# Altium PCB STM32 24V Industrial IO Bridge.PcbDoc (part 1 of 3)
Units mil, origin at the board's own origin, x right, y up, seen from the top; angles counter-clockwise.
Board outline 3937.01 x 3149.61 mil, 2 copper layers (Top Layer, Bottom Layer); 143 components, 89 nets, 439 pads, 318 vias.
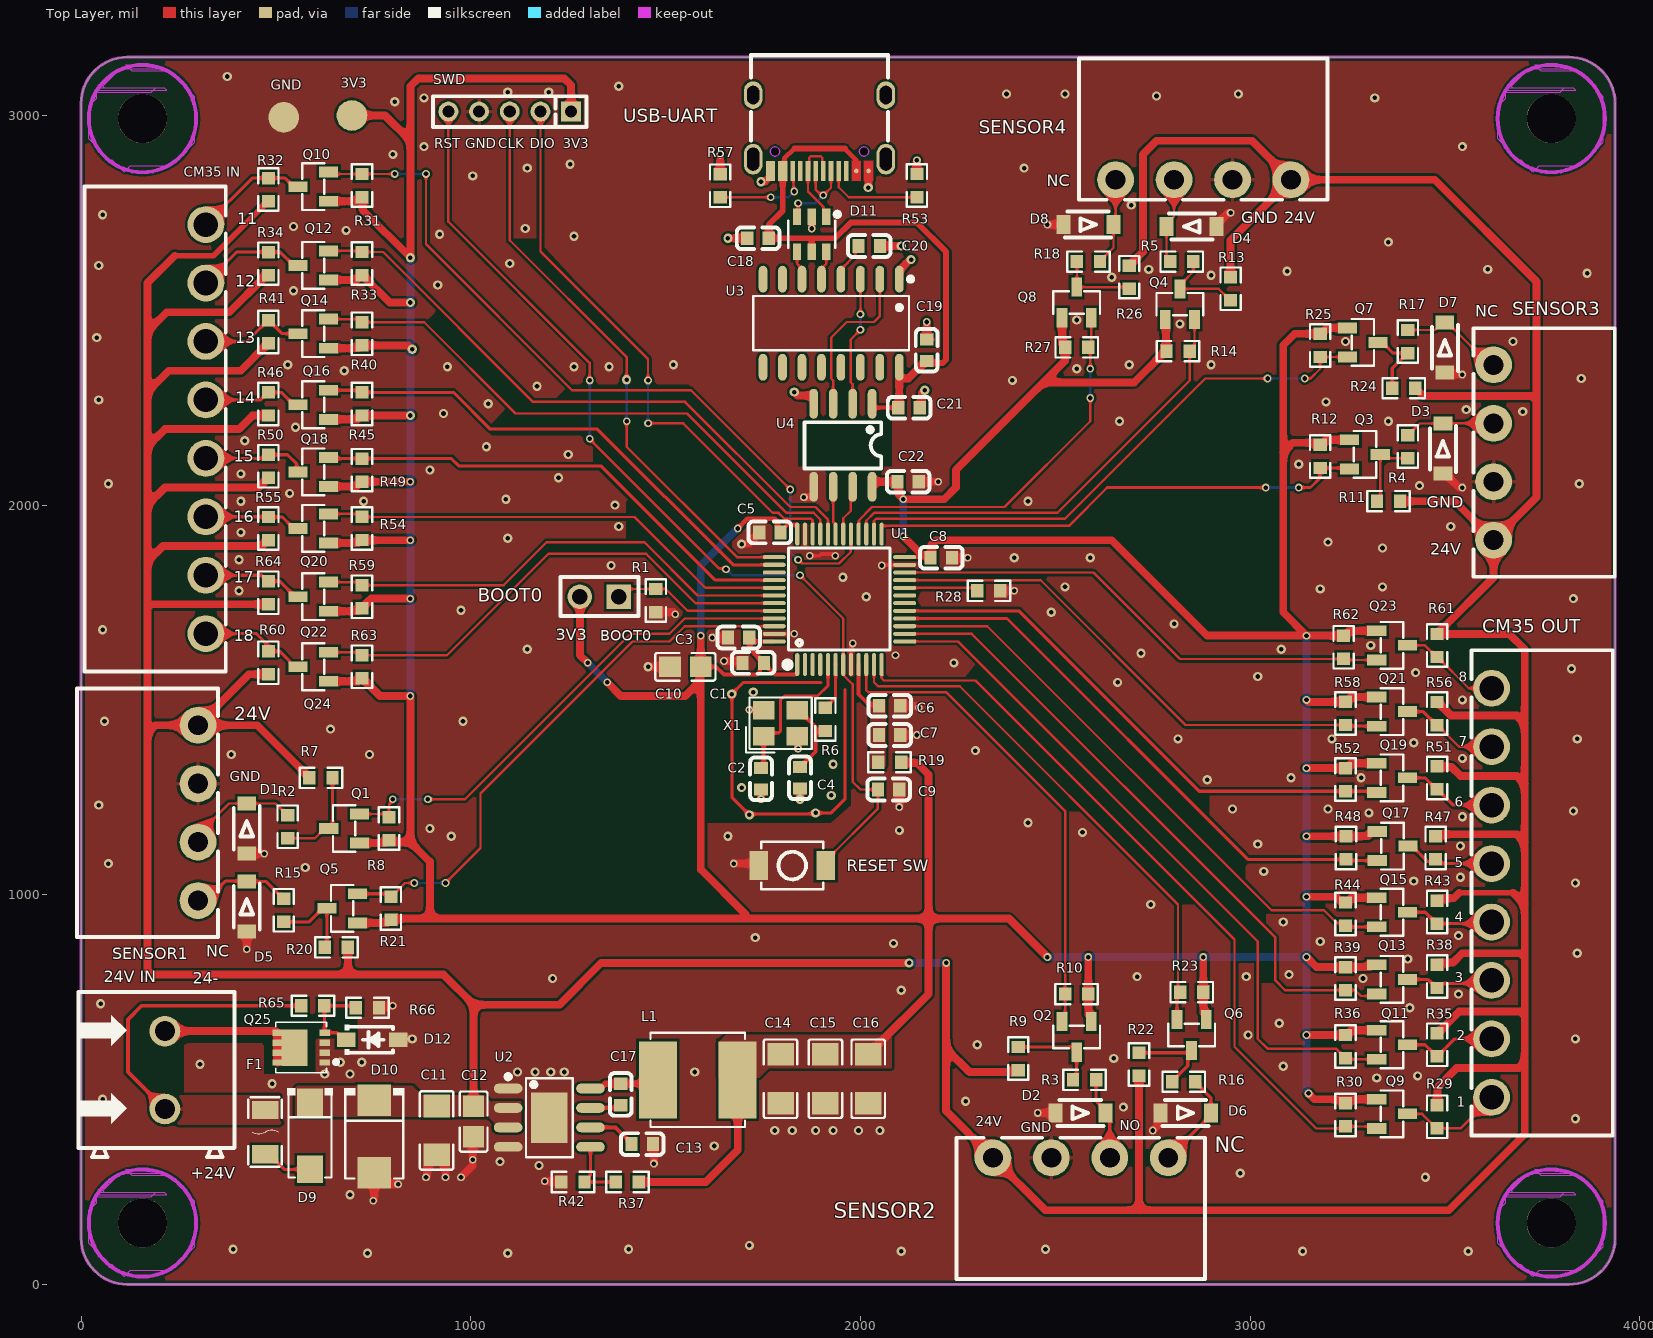
[diagram p0: Top Layer view]
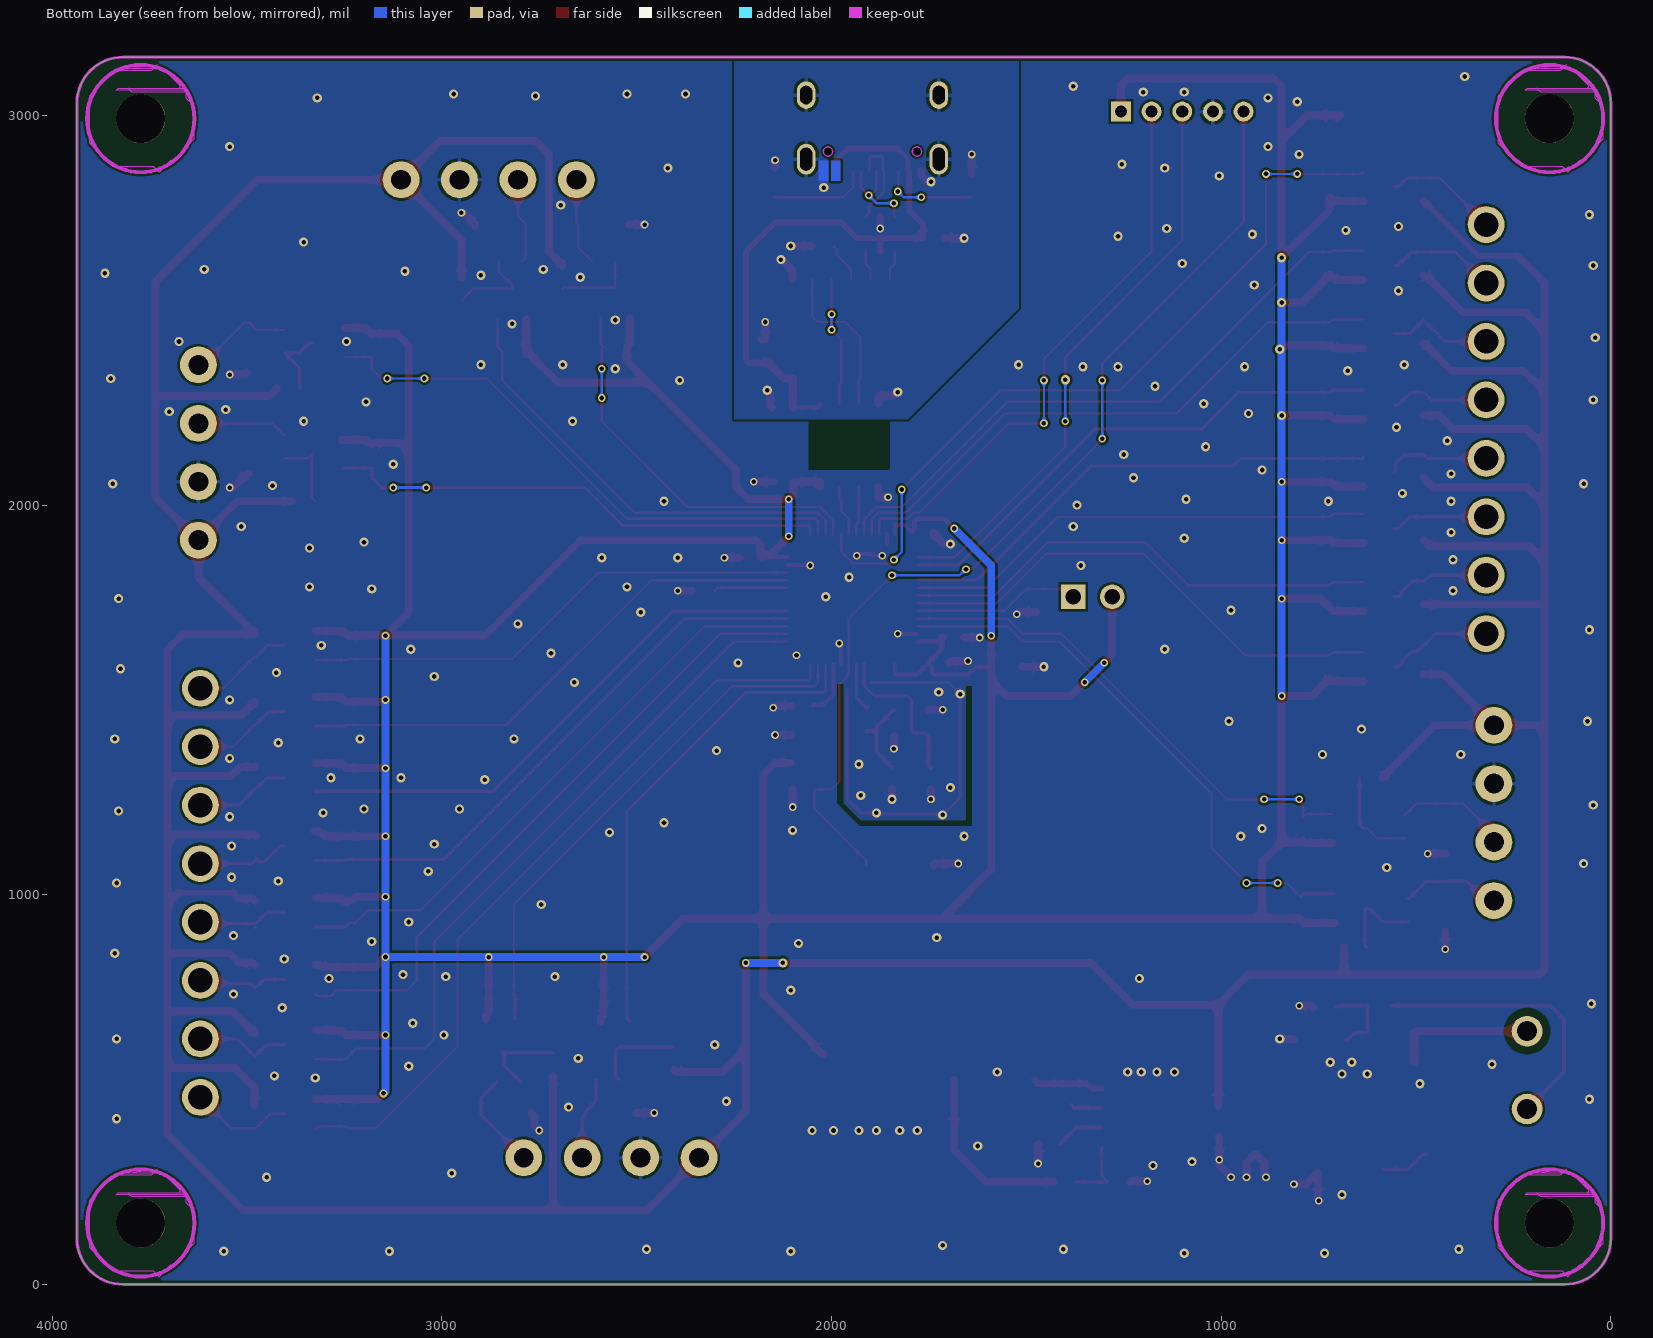
[diagram p1: Bottom Layer view, seen from below]

## Layer stack, top to bottom
Top Solder: solder mask 0.4, Solder Resist, Dk 3.5
Top Layer: signal copper 1.4
Dielectric 1: dielectric 12.6, FR-4, Dk 4.8
Bottom Layer: signal copper 1.4
Bottom Solder: solder mask 0.4, Solder Resist, Dk 3.5

## Board outline
0,118.11 0,3031.5 cw(c118.11,3031.5) 118.11,3149.61 3818.9,3149.61 cw(c3818.9,3031.5) 3937.01,3031.5 3937.01,118.11 cw(c3818.9,118.11) 3818.9,0 118.11,0 cw(c118.11,118.11)

## Design rules (kind name [scope] priority, off if disabled: settings)
Clearance Clearance_GND_RAW [InNet('GND_IN_RAW') vs InNet('GND')] p1: gap=20 ignorepadtopadclearanceinfootprint=FALSE
Clearance [All] p2: gap=6 ignorepadtopadclearanceinfootprint=FALSE
DiffPairsRouting DiffPairsRouting_USB [All] p1: maxlimit=8 minlimit=6 mostfreqgap=8 toplayer_minwidth=6 toplayer_maxwidth=8 toplayer_prefwidth=8 bottomlayer_minwidth=6 bottomlayer_maxwidth=8 bottomlayer_prefwidth=8 maxuncoupledlength=200
HoleSize [All] p1: absolutevalues=TRUE maxlimit=240 minlimit=10 maxpercent=80.000 minpercent=20.000
HoleToHoleClearance [All] p1: gap=8 allowstackedmicrovias=TRUE
MinimumSolderMaskSliver [All] p1: minsoldermaskwidth=6
PolygonConnect [All] p1: thpad.connectstyle=Relief thpad.reliefconductorwidth=10 thpad.reliefentries=4 thpad.polygonreliefangle="90 Angle" thpad.airgapwidth=8 smdpad.connectstyle=Direct smdpad.reliefconductorwidth=10 smdpad.reliefentries=4 smdpad.polygonreliefangle="90 Angle" smdpad.airgapwidth=10 via.connectstyle=Direct via.reliefconductorwidth=10 via.reliefentries=4 via.polygonreliefangle="90 Angle" via.airgapwidth=10
RoutingVias [All] p1: holewidth=15.75 width=31.5 viastyle="Through Hole" minholewidth=9.84 minwidth=19.68 maxholewidth=11.81 maxwidth=23.62
SilkToSilkClearance [All] p1: silktosilkclearance=6
SilkToSolderMaskClearance [IsPad] p1: minsilkscreentomaskgap=6 clearancetoexposedcopper=TRUE
SolderMaskExpansion [All] p1: expansion=2 istentingtop=FALSE
Width Width_SW_NODE [InNet('SW_NODE')] p1: maxlimit=24 minlimit=16 preferedwidth=20 minimp=50.000000 maximp=50.000000 favimp=50.000000
Width Width_POWER [InNetClass('NC_POWER')] p2: maxlimit=32 minlimit=8 preferedwidth=20 minimp=50.000000 maximp=50.000000 favimp=50.000000
Width [All] p3: maxlimit=15 minlimit=6 preferedwidth=6 minimp=50.000000 maximp=50.000000 favimp=50.000000
24 further rules are at their usual default settings.

## Classes and differential pairs
net class NC_USB_DATA: USB_DM USB_DM_RAW USB_DP USB_DP_RAW
net class NC_POWER: 3V3 24V_IN_RAW 24V_PROTECTED GND GND_IN_RAW USB_GND USB_VBUS
differential pair USB_DATA: +USB_DP -USB_DM
differential pair USB_RAW: +USB_DP_RAW -USB_DM_RAW

## Components (designator, comment, footprint, x,y, rotation, side; value= is the part's Value field where it differs from the comment)
"24V IN" "WJ500V-5.08-2P" CONN-TH_2P-P5.00_WJ500V-5.08-2P 215,550 r90 top (schematic designator P1)
BOOT0 "LAIL-PZ2.54-2P-L" CONN-TH_LAIL-PZ2.54-2P-L 1330,1765 r180 top (schematic designator H1)
C1 "100nF" C0603 1725,1595 r0 top
C2 "15pF" C0603 1745,1297.44 r90 top
C3 "100nF" C0603 1687.44,1660 r0 top
C4 "15pF" C0603 1845,1300 r270 top
C5 "100nF" C0603 1767.56,1930 r0 top
C6 "100nF" C0603 2075,1485 r180 top
C7 "1uF" C0603 2075,1410 r180 top
C8 "100nF" C0603 2207.56,1865 r180 top
C9 "100nF" C0603 2072.44,1270 r180 top
C10 "10uF" C0805 1550.63,1585 r180 top
C11 "2.2uF" C1206 912.2,395.09 r90 top
C12 "220nF" C0805 1007.2,417.79 r90 top
C13 "1uF" C0603 1440,360 r180 top
C14 "22uF" C1206 1795,527.7 r90 top
C15 "22uF" C1206 1910,527.7 r90 top
C16 "22uF" C1206 2020,527.7 r90 top
C17 "100nF" C0603 1385,487.56 r270 top
C18 "100nF" C0603 1737.44,2685 r0 top
C19 "100nF" C0603 2170,2397.44 r90 top
C20 "100nF" C0603 2022.56,2665 r180 top
C21 "100nF" C0603 2125,2250 r180 top
C22 "100nF" C0603 2122.44,2060 r180 top
"CM35 IN" "KF2EDGR-3.81-8P" CONN-TH_8P-P3.81_KF2EDGR-3.81-8P 320,2194.99 r270 top (schematic designator CN6)
"CM35 OUT" "KF2EDGR-3.81-8P" CONN-TH_8P-P3.81_KF2EDGR-3.81-8P 3620,1005 r90 top (schematic designator CN5)
D1 "SMF30A" SOD-123FL_L2.7-W1.8-LS3.7-R-RD 425,1170 r270 top
D2 "SMF30A" SOD-123FL_L2.7-W1.8-LS3.7-R-RD 2565,440 r180 top
D3 "SMF30A" SOD-123FL_L2.7-W1.8-LS3.7-R-RD 3495,2145 r270 top
D4 "SMF30A" SOD-123FL_L2.7-W1.8-LS3.7-R-RD 2850,2715 r0 top
D5 "SMF30A" SOD-123FL_L2.7-W1.8-LS3.7-R-RD 425,970 r270 top
D6 "SMF30A" SOD-123FL_L2.7-W1.8-LS3.7-R-RD 2835,440 r180 top
D7 "SMF30A" SOD-123FL_L2.7-W1.8-LS3.7-R-RD 3500,2404.34 r270 top
D8 "SMF30A" SOD-123FL_L2.7-W1.8-LS3.7-R-RD 2585,2720 r180 top
D9 "STPS2H100A" SMA_L4.4-W2.6-LS5.0-RD 587.2,381.47 r270 top
D10 "SMBJ30A-TR" SMB_L4.6-W3.6-LS5.3-RD 752.2,379.85 r270 top
D11 "USBLC6-2SC6" SOT-23-6_L2.9-W1.6-P0.95-LS2.8-BL 1875,2695 r180 top
D12 "MMSZ5242B-7-F" SOD-123_L2.7-W1.6-LS3.7-RD-1 747.2,627.79 r0 top
F1 "0468.500NRHF" F1206 472.2,390.9 r270 top
L1 "22uH" IND-SMD_L6.0-W6.0_SWPA6045S 1582.48,525 r0 top
Q1 "2N7002" SOT-23-3_L2.9-W1.3-P1.90-LS2.4-BR 675,1170 r0 top
Q2 "2N7002" SOT-23-3_L2.9-W1.3-P1.90-LS2.4-BR 2555,635 r90 top
Q3 "2N7002" SOT-23-3_L2.9-W1.3-P1.90-LS2.4-BR 3295,2130 r180 top
Q4 "2N7002" SOT-23-3_L2.9-W1.3-P1.90-LS2.4-BR 2820,2515.63 r270 top
Q5 "2N7002" SOT-23-3_L2.9-W1.3-P1.90-LS2.4-BR 670,965 r0 top
Q6 "2N7002" SOT-23-3_L2.9-W1.3-P1.90-LS2.4-BR 2850,640 r90 top
Q7 "2N7002" SOT-23-3_L2.9-W1.3-P1.90-LS2.4-BR 3289.37,2417.4 r180 top
Q8 "2N7002" SOT-23-3_L2.9-W1.3-P1.90-LS2.4-BR 2555,2520 r270 top
Q9 "2N7002" SOT-23-3_L2.9-W1.3-P1.90-LS2.4-BR 3364.37,437.6 r180 top
Q10 "2N7002" SOT-23-3_L2.9-W1.3-P1.90-LS2.4-BR 595.68,2817.4 r0 top
Q11 "2N7002" SOT-23-3_L2.9-W1.3-P1.90-LS2.4-BR 3364.37,615 r180 top
Q12 "2N7002" SOT-23-3_L2.9-W1.3-P1.90-LS2.4-BR 595.68,2615 r0 top
Q13 "2N7002" SOT-23-3_L2.9-W1.3-P1.90-LS2.4-BR 3364.37,782.6 r180 top
Q14 "2N7002" SOT-23-3_L2.9-W1.3-P1.90-LS2.4-BR 595.68,2440 r0 top
Q15 "2N7002" SOT-23-3_L2.9-W1.3-P1.90-LS2.4-BR 3364.37,955 r180 top
Q16 "2N7002" SOT-23-3_L2.9-W1.3-P1.90-LS2.4-BR 595.68,2257.4 r0 top
Q17 "2N7002" SOT-23-3_L2.9-W1.3-P1.90-LS2.4-BR 3365.63,1125 r180 top
Q18 "2N7002" SOT-23-3_L2.9-W1.3-P1.90-LS2.4-BR 595.68,2085 r0 top
Q19 "2N7002" SOT-23-3_L2.9-W1.3-P1.90-LS2.4-BR 3364.37,1300 r180 top
Q20 "2N7002" SOT-23-3_L2.9-W1.3-P1.90-LS2.4-BR 595.68,1940 r0 top
Q21 "2N7002" SOT-23-3_L2.9-W1.3-P1.90-LS2.4-BR 3364.37,1470 r180 top
Q22 "2N7002" SOT-23-3_L2.9-W1.3-P1.90-LS2.4-BR 595.68,1765 r0 top
Q23 "2N7002" SOT-23-3_L2.9-W1.3-P1.90-LS2.4-BR 3364.37,1640 r180 top
Q24 "2N7002" SOT-23-3_L2.9-W1.3-P1.90-LS2.4-BR 595.68,1585 r0 top
Q25 "DMT10H015LFG-13" POWERDI3333-8_L3.3-W3.3-P0.65-LS3.7-BL-EP 564.65,607.79 r90 top
R1 "10kΩ" R0603 1475,1755 r270 top
R2 "100Ω" R0603 530,1174.66 r270 top
R3 "100Ω" R0603 2575.34,525 r180 top
R4 "100Ω" R0603 3405,2150 r270 top
R5 "100Ω" R0603 2824.66,2625 r0 top
R6 "0Ω" R0603 1910,1450 r90 top
R7 "10kΩ" R0603 615.34,1300 r0 top
R8 "10kΩ" R0603 790,1169.66 r90 top
R9 "10kΩ" R0603 2405,579.66 r90 top
R10 "10kΩ" R0603 2555,745 r180 top
R11 "10kΩ" R0603 3355.34,2010 r180 top
R12 "10kΩ" R0603 3180,2125 r270 top
R13 "10kΩ" R0603 2950,2555.34 r270 top
R14 "10kΩ" R0603 2815.34,2395 r0 top
R15 "100Ω" R0603 520,960 r270 top
R16 "100Ω" R0603 2830,520 r180 top
R17 "100Ω" R0603 3405,2419.66 r270 top
R18 "100Ω" R0603 2585.34,2625 r180 top
R19 "0Ω" R0603 2075,1340 r180 top
R20 "10kΩ" R0603 655,865 r180 top
R21 "10kΩ" R0603 795,965 r90 top
R22 "10kΩ" R0603 2715,564.66 r90 top
R23 "10kΩ" R0603 2850.34,750 r180 top
R24 "10kΩ" R0603 3394.66,2300 r180 top
R25 "10kΩ" R0603 3180,2409.66 r270 top
R26 "10kΩ" R0603 2690,2585 r270 top
R27 "10kΩ" R0603 2555.34,2405 r0 top
R28 "10kΩ" R0603 2329.66,1780 r180 top
R29 "10kΩ" R0603 3480,430 r90 top
R30 "10kΩ" R0603 3245,435 r90 top
R31 "10kΩ" R0603 720.68,2820 r270 top
R32 "10kΩ" R0603 480.68,2809.66 r270 top
R33 "10kΩ" R0603 720.68,2620 r270 top
R34 "10kΩ" R0603 480.68,2619.66 r270 top
R35 "10kΩ" R0603 3480,615 r90 top
R36 "10kΩ" R0603 3245,610.34 r90 top
R37 "100kΩ" R0603 1401.86,262.79 r0 top
R38 "10kΩ" R0603 3480,790.34 r90 top
R39 "10kΩ" R0603 3245,784.66 r90 top
R40 "10kΩ" R0603 720.68,2439.66 r270 top
R41 "10kΩ" R0603 480.68,2444.66 r270 top
R42 "43.2kΩ" R0603 1262.2,262.79 r0 top
R43 "10kΩ" R0603 3480,955.34 r90 top
R44 "10kΩ" R0603 3245,950.34 r90 top
R45 "10kΩ" R0603 720.68,2259.66 r270 top
R46 "10kΩ" R0603 480.68,2259.66 r270 top
R47 "10kΩ" R0603 3476.26,1120.34 r90 top
R48 "10kΩ" R0603 3246.26,1120.34 r90 top
R49 "10kΩ" R0603 720.68,2089.66 r270 top
R50 "10kΩ" R0603 480.68,2099.66 r270 top
R51 "10kΩ" R0603 3480,1300 r90 top
R52 "10kΩ" R0603 3245,1295.34 r90 top
R53 "5.1kΩ" R0603 2145,2820 r270 top
R54 "10kΩ" R0603 720.68,1940 r270 top
R55 "10kΩ" R0603 480.68,1939.66 r270 top
R56 "10kΩ" R0603 3480,1465 r90 top
R57 "5.1kΩ" R0603 1640,2819.66 r270 top
R58 "10kΩ" R0603 3245,1465.34 r90 top
R59 "10kΩ" R0603 720.68,1764.66 r270 top
R60 "10kΩ" R0603 480.68,1775 r270 top
R61 "10kΩ" R0603 3480,1639.66 r90 top
R62 "10kΩ" R0603 3240,1635.34 r90 top
R63 "10kΩ" R0603 720.68,1585 r270 top
R64 "10kΩ" R0603 480.68,1595.34 r270 top
R65 "10kΩ" R0603 594.66,715 r180 top
R66 "100kΩ" R0603 734.66,710 r180 top
"RESET SW" "TS-1088-AR02016" SW-SMD_L3.9-W3.0-P4.45 1825,1075 r180 top (schematic designator SW1)
SENSOR1 "KF2EDGR-3.81-4P" CONN-TH_4P-P3.81_KF2EDGR-3.81-4P 300,1210 r270 top (schematic designator CN1)
SENSOR2 "KF2EDGR-3.81-4P" CONN-TH_4P-P3.81_KF2EDGR-3.81-4P 2565,325 r0 top (schematic designator CN2)
SENSOR3 "KF2EDGR-3.81-4P" CONN-TH_4P-P3.81_KF2EDGR-3.81-4P 3625,2135 r90 top (schematic designator CN3)
SENSOR4 "KF2EDGR-3.81-4P" CONN-TH_4P-P3.81_KF2EDGR-3.81-4P 2880,2835 r180 top (schematic designator CN4)
SWD "LAIL-PZ2.0-5P-L" HDR-TH_LAIL-PZ2.0-5P-L 1100,3010 r180 top (schematic designator H2)
U1 "STM32F103C8T6" LQFP-48_L7.0-W7.0-P0.50-LS9.0-BL 1946.22,1758.15 r0 top
U2 "LMR36510FADDAR" ESOP-8_L4.9-W3.9-P1.27-LS6.0-BL-EP-1 1201.59,427.79 r270 top
U3 "CH340C" SOP-16_L10.0-W3.9-P1.27-LS6.0-BL 1925,2466.91 r180 top
U4 "ISO7721DR" SOIC-8_L5.0-W4.0-P1.27-LS6.0-BL 1955,2153.5 r180 top
USB-UART "TYPE-C-31-M-12" USB-C_SMD-TYPE-C-31-M-12_1 1895,2955 r180 top (schematic designator USBC1)
X1 "8MHz" CRYSTAL-SMD_4P-L3.2-W2.5-BL 1795,1440 r0 top

## Footprints (in the part's own frame and the unit in brackets; to place one, negate y for a bottom-side part, rotate by r counter-clockwise, add the part's x,y. Pads: shape width x height; smd on the part's side, far side on the other; paste and mask are expansions set on the pad)
C0603 [mm]
  rect 0.8x0.9 smd: 1(-0.7,0) 2(0.7,0)
  silkscreen extent -1.39,-0.71 1.39,0.71
C0805 [mm]
  rect 1.41x1.35 smd: 1(-1,0) 2(1,0)
  silkscreen extent -1.96,-0.9 1.96,0.9
C1206 [mm]
  rect 1.485x1.728 smd: 1(-1.593,0) 2(1.593,0)
  silkscreen extent -2.56,-1.09 2.56,1.09
CONN-TH_2P-P5.00_WJ500V-5.08-2P [mm]
  round 2 hole 1.3: 1(-2.54,0) 2(2.54,0)
  silkscreen extent -5.68,-4.52 5.08,5.64
CONN-TH_4P-P3.81_KF2EDGR-3.81-4P [mm]
  round 2.4 hole 1.3: 1(-5.715,0) 2(-1.905,0) 3(1.905,0) 4(5.715,0)
  silkscreen extent -8.1,-7.9 8.1,1.3
CONN-TH_8P-P3.81_KF2EDGR-3.81-8P [mm]
  round 2.4 hole 1.6: 1(-13.335,0) 2(-9.525,0) 3(-5.715,0) 4(-1.905,0) 5(1.905,0) 6(5.715,0) 7(9.525,0) 8(13.335,0)
  silkscreen extent -15.81,-7.9 15.81,1.3
CONN-TH_LAIL-PZ2.54-2P-L [mm]
  rect 1.6x1.6 hole 1 paste-2539.97: 1(-1.27,0)
  round 1.6 hole 1 paste-2539.97: 2(1.27,0)
  silkscreen extent -2.54,-1.27 2.54,1.27
CRYSTAL-SMD_4P-L3.2-W2.5-BL [mm]
  rect 1.4x1.2 smd: 1(-1.1,-0.85) 2(1.1,-0.85) 3(1.1,0.85) 4(-1.1,0.85)
  silkscreen extent -2.26,-1.91 2.03,1.68
ESOP-8_L4.9-W3.9-P1.27-LS6.0-BL-EP-1 [mm]
  oval 0.63x1.865 smd: 1(-1.905,-2.682) 2(-0.635,-2.682) 3(0.635,-2.682) 4(1.905,-2.682) 5(1.905,2.682) 6(0.635,2.682) 7(-0.635,2.682) 8(-1.905,2.682)
  rect 3.3x2.4 smd: 9(0,0)
  silkscreen extent -2.82,-2.83 2.58,1.52
F1206 [mm]
  rect 1.19x1.728 smd: 1(-1.445,0) 2(1.445,0)
  silkscreen extent -2.27,-1.09 2.27,1.09
HDR-TH_LAIL-PZ2.0-5P-L [mm]
  rect 1.3x1.3 hole 0.8 paste-2539.97: 1(-4,0)
  round 1.3 hole 0.8 paste-2539.97: 2(-2,0) 3(0,0) 4(2,0) 5(4,0)
  silkscreen extent -5,-1 5,1.02
IND-SMD_L6.0-W6.0_SWPA6045S [mm]
  rect 2.474x5.02 smd: 1(-2.603,0) 2(2.603,0)
  silkscreen extent -3.08,-3.08 3.08,3.08
LQFP-48_L7.0-W7.0-P0.50-LS9.0-BL [mm]
  oval 0.27x1.5 smd: 1(-2.75,-4.25) 2(-2.25,-4.25) 3(-1.75,-4.25) 4(-1.25,-4.25) 5(-0.75,-4.25) 6(-0.25,-4.25) 7(0.25,-4.25) 8(0.75,-4.25) 9(1.25,-4.25) 10(1.75,-4.25) 11(2.25,-4.25) 12(2.75,-4.25) 25(2.75,4.25) 26(2.25,4.25) 27(1.75,4.25) 28(1.25,4.25) 29(0.75,4.25) 30(0.25,4.25) 31(-0.25,4.25) 32(-0.75,4.25) 33(-1.25,4.25) 34(-1.75,4.25) 35(-2.25,4.25) 36(-2.75,4.25)
  oval 1.5x0.27 smd: 13(4.25,-2.75) 14(4.25,-2.25) 15(4.25,-1.75) 16(4.25,-1.25) 17(4.25,-0.75) 18(4.25,-0.25) 19(4.25,0.25) 20(4.25,0.75) 21(4.25,1.25) 22(4.25,1.75) 23(4.25,2.25) 24(4.25,2.75) 37(-4.25,2.75) 38(-4.25,2.25) 39(-4.25,1.75) 40(-4.25,1.25) 41(-4.25,0.75) 42(-4.25,0.25) 43(-4.25,-0.25) 44(-4.25,-0.75) 45(-4.25,-1.25) 46(-4.25,-1.75) 47(-4.25,-2.25) 48(-4.25,-2.75)
  silkscreen extent -3.59,-4.46 3.3,3.34
POWERDI3333-8_L3.3-W3.3-P0.65-LS3.7-BL-EP [mm]
  rect 0.42x0.7 smd: 1(-0.975,-1.532) 2(-0.325,-1.533) 3(0.325,-1.533) 4(0.975,-1.533) 5(0.975,1.533) 6(0.325,1.533) 7(-0.325,1.533) 8(-0.975,1.533)
  rect 2.38x1.7 smd: 9(0,0.443)
  silkscreen extent -1.66,-2.4 1.64,1.65
R0603 [mil]
  rect 31.75x34.02 smd: 1(-29.66,0) 2(29.66,0)
  silkscreen extent -55,-26 55,26
SMA_L4.4-W2.6-LS5.0-RD [mm]
  rect 1.8x1.7 smd: 1(-2.192,0) 2(2.192,0)
  silkscreen extent -3.11,-1.48 2.73,1.48
SMB_L4.6-W3.6-LS5.3-RD [mil]
  rect 80.61x86.31 smd: 1(-92.94,0) 2(92.94,0)
  silkscreen extent -123,-77 108,77
SOD-123_L2.7-W1.6-LS3.7-RD-1 [mm]
  rect 1.2x0.95 smd: 1(-1.7,0) 2(1.7,0)
  silkscreen extent -1.81,-0.98 1.35,0.98
SOD-123FL_L2.7-W1.8-LS3.7-R-RD [mil]
  rect 35.8x48 smd: 1(64.35,0) 2(-64.35,0)
  silkscreen extent -58,-33 60,33
SOIC-8_L5.0-W4.0-P1.27-LS6.0-BL [mil]
  oval 22.38x76.78 smd: 1(-75,-106.5) 2(-25,-106.5) 3(25,-106.5) 4(75,-106.5) 5(75,106.5) 6(25,106.5) 7(-25,106.5) 8(-75,106.5)
  silkscreen extent -98,-59 98,59
SOP-16_L10.0-W3.9-P1.27-LS6.0-BL [mm]
  oval 0.56x1.745 smd: 1(-4.445,-2.872) 2(-3.175,-2.872) 3(-1.905,-2.872) 4(-0.635,-2.872) 5(0.635,-2.872) 6(1.905,-2.872) 7(3.175,-2.872) 8(4.445,-2.872) 9(4.445,2.872) 10(3.175,2.872) 11(1.905,2.872) 12(0.635,2.872) 13(-0.635,2.872) 14(-1.905,2.872) 15(-3.175,2.872) 16(-4.445,2.872)
  silkscreen extent -5.33,-3.02 5.08,1.77
SOT-23-3_L2.9-W1.3-P1.90-LS2.4-BR [mm]
  rect 1.25x0.7 smd: 1(1,-0.95) 2(1,0.95) 3(-1,0)
  silkscreen extent -0.73,-1.53 0.73,1.53
SOT-23-6_L2.9-W1.6-P0.95-LS2.8-BL [mil]
  rect 20.95x42.2 smd: 1(-37.4,-45.24) 2(0,-45.24) 3(37.4,-45.24) 4(37.4,45.24) 5(0,45.24) 6(-37.4,45.24)
  silkscreen extent -72,-57 61,35
SW-SMD_L3.9-W3.0-P4.45 [mm]
  rect 1.23x1.86 smd: 1(-2.185,0) 2(2.185,0)
  silkscreen extent -2.03,-1.54 2.03,1.54
USB-C_SMD-TYPE-C-31-M-12_1 [mm]
  oval 1.2x2 hole 0.8 slot 1.5 at 90 deg paste-2539.97: 1(4.325,1.706) 4(-4.325,1.706)
  oval 1.2x1.8 hole 0.8 slot 1.2 at 90 deg copper offset 0,0 paste-2539.97: 2(4.325,-2.474) 3(-4.325,-2.474)
  round 0.3 smd: A1B12(-3.2,2.474) A4B9(-2.4,2.474)
  rect 0.3x1.3 smd: A5(-1.25,2.474) A6(-0.25,2.474) A7(0.25,2.474) A8(1.25,2.474) B5(1.75,2.474) B6(0.75,2.474) B7(-0.75,2.474) B8(-1.75,2.474)
  rect 0.6x1.3 smd: B1A12(3.2,2.474) B4A9(2.4,2.474)
  Top Layer region: -2.1,1.824 -2.1,3.124 -2.4,3.124 -2.4,3.124 -2.7,3.124 -2.7,1.824 -2.4,1.824 -2.4,1.824 -2.1,1.824
  Top Layer region: -2.9,1.824 -2.9,3.124 -3.2,3.124 -3.2,3.124 -3.5,3.124 -3.5,1.824 -3.2,1.824 -3.2,1.824 -2.9,1.824
  Bottom Layer region: -2.1,1.824 -2.1,3.124 -2.4,3.124 -2.4,3.124 -2.7,3.124 -2.7,1.824 -2.4,1.824 -2.4,1.824 -2.1,1.824
  Bottom Layer region: -2.9,1.824 -2.9,3.124 -3.2,3.124 -3.2,3.124 -3.5,3.124 -3.5,1.824 -3.2,1.824 -3.2,1.824 -2.9,1.824
  Keep-Out Layer board cut-out: 3.2,1.206 3.2,1.146 3.154,1.036 3.07,0.951 2.96,0.906 2.84,0.906 2.73,0.951 2.646,1.036 2.6,1.146 2.6,1.206 2.6,1.265 2.646,1.376 2.73,1.46 2.84,1.506 2.96,1.506 3.07,1.46 3.154,1.376 3.2,1.265 3.2,1.206 3.2,1.206
  Keep-Out Layer board cut-out: -2.6,1.206 -2.6,1.146 -2.646,1.036 -2.73,0.951 -2.84,0.906 -2.96,0.906 -3.07,0.951 -3.154,1.036 -3.2,1.146 -3.2,1.206 -3.2,1.265 -3.154,1.376 -3.07,1.46 -2.96,1.506 -2.84,1.506 -2.73,1.46 -2.646,1.376 -2.6,1.265 -2.6,1.206 -2.6,1.206
  Keep-Out Layer circle w0.003: c2.9,1.206 r0.3
  Keep-Out Layer circle w0.003: c-2.9,1.206 r0.3
  Keep-Out Layer region: 3.2,1.206 3.191,1.134 3.166,1.066 3.124,1.007 3.07,0.959 3.006,0.925 2.936,0.908 2.864,0.908 2.794,0.925 2.729,0.959 2.675,1.007 2.634,1.066 2.609,1.134 2.6,1.206 2.609,1.277 2.634,1.345 2.675,1.405 2.729,1.453 2.794,1.486 2.864,1.503 2.936,1.503 3.006,1.486 3.07,1.453 3.124,1.405 3.166,1.345 3.191,1.277 3.2,1.206
  Keep-Out Layer region: 3.2,1.206 3.2,1.146 3.154,1.036 3.07,0.951 2.96,0.906 2.84,0.906 2.73,0.951 2.646,1.036 2.6,1.146 2.6,1.206 2.6,1.265 2.646,1.376 2.73,1.46 2.84,1.506 2.96,1.506 3.07,1.46 3.154,1.376 3.2,1.265 3.2,1.206 3.2,1.206
  Keep-Out Layer region: -2.6,1.206 -2.609,1.134 -2.634,1.066 -2.675,1.007 -2.729,0.959 -2.794,0.925 -2.864,0.908 -2.936,0.908 -3.006,0.925 -3.07,0.959 -3.124,1.007 -3.166,1.066 -3.191,1.134 -3.2,1.206 -3.191,1.277 -3.166,1.345 -3.124,1.405 -3.07,1.453 -3.006,1.486 -2.936,1.503 -2.864,1.503 -2.794,1.486 -2.729,1.453 -2.675,1.405 -2.634,1.345 -2.609,1.277 -2.6,1.206
  Keep-Out Layer region: -2.6,1.206 -2.6,1.146 -2.646,1.036 -2.73,0.951 -2.84,0.906 -2.96,0.906 -3.07,0.951 -3.154,1.036 -3.2,1.146 -3.2,1.206 -3.2,1.265 -3.154,1.376 -3.07,1.46 -2.96,1.506 -2.84,1.506 -2.73,1.46 -2.646,1.376 -2.6,1.265 -2.6,1.206 -2.6,1.206
  Multi-Layer region: -2.1,1.824 -2.1,3.124 -2.4,3.124 -2.4,3.124 -2.7,3.124 -2.7,1.824 -2.4,1.824 -2.4,1.824 -2.1,1.824
  Multi-Layer region: -2.9,1.824 -2.9,3.124 -3.2,3.124 -3.2,3.124 -3.5,3.124 -3.5,1.824 -3.2,1.824 -3.2,1.824 -2.9,1.824
  silkscreen extent -4.47,-5.09 4.47,0.49

## Part data
"24V IN": "结构:1x2P;间距:5.08mm;颜色:绿色;安装方式:直插;额定电流:18A;额定电压:250V;排数:1;线规 - AWG:14~30;线规 - 平方毫米:2.5;每排PIN数:2;触头材质:-;触头镀层:-;工作温度范围:-40℃~+105℃;焊接温度(最大值):-;", Color=绿色, Current Rating (Max)=18A, JLCPCB Part Class=扩展库, LCSC Part Name="1x2P 5.08mm 直插 排数:1 每排P数:2", Manufacturer=KANGNEX(康奈克斯电气), Operating Temperature Range=-40℃~+105℃, Soldering Temperature(Max)=-, Voltage Rating (Max)=250V, 3D Model=0f4a503c8d3b4ae19ed61267f5e9a1d7, 3D Model Transform=423.621,393.7,0,0,0,0,-11.811,19.685,-137.795, AddInBom=yes, Contact Material=-, Contact Plating=-, ConvertToPcb=yes, Datasheet=https://atta.szlcsc.com/upload/public/pdf/source/20191225/C8465_02D34CE5B5B4A53DF5891601D97FA9F4.pdf, Device=WJ500V-5.08-2P, FootprintName=CONN-TH_2P-P5.00_WJ500V-5.08-2P, Manufacturer Part=WJ500V-5.08-2P, ModelName=CONN-TH_2P-P5.00_WJ500V-5.08-2P, Mounting Style=直插, Number of Pins=2P, Number of PINs Per Row=2, Number of Rows=1, Pitch=5.08mm, Screw Specification=M2.5, Structure=1x2P, Supplier=LCSC, Supplier Footprint=插件,P=5.08mm, Supplier Part=C8465, Symbol=WJ500V-5.08-2P-14-00A, Wire Gauge - AWG=14~30, Wire Gauge - mm2=2.5
BOOT0: "插针结构:1x2P;间距:2.54mm;圆针/方针:方针;排数:单排;总PIN位数:2P;额定电流:3A;额定电压:250V;塑高:2.5mm;端接针长度:3mm;触头材质:黄铜;触头镀层:金;工作温度:-25℃~+80℃;颜色:黑色;", Color=黑色, Current Rating=3A, JLCPCB Part Class="Extended Part", LCSC Part Name="1x2P 间距:2.54mm 方针", Manufacturer=莱联, Operating Temperature=-25℃~+80℃, Voltage Rating (Max)=250V, AddInBom=yes, Circluar Pins/Square Pins=方针, Contact Material=黄铜, Contact Plating=金, ConvertToPcb=yes, Datasheet=https://item.szlcsc.com/datasheet/LAIL-PZ2.54-2P-L/58519956.html, Device=LAIL-PZ2.54-2P-L, FootprintName=CONN-TH_LAIL-PZ2.54-2P-L, Insulation Height=2.5mm, Length of End Connection Pin=3mm, ManufacturerPart=LAIL-PZ2.54-2P-L, Number of Pins=2P, Number of Rows=单排, Pin Structure=1x2P, Pitch=2.54mm, Supplier=LCSC, Supplier Footprint=插件,P=2.54mm, SupplierPart=C54950603, Symbol=LAIL-PZ2.54-2P-L
C1 C3 C5 C6 C8 C9 C17 C18 C19 C20 C21 C22: library part 0603B104K500NT, "容值:100nF;精度:±10%;额定电压:50V;温度系数:X7R;", JLCPCB Part Class="Extended Part", LCSC Part Name="100nF ±10% 50V", Manufacturer=FH(风华), Temperature Coefficient=X7R, Tolerance=±10%, Voltage Rating=50V, 3D Model=ac125912035d415993ca9572d50418b1, 3D Model Transform=62.992,31.496,0,0,0,0,0,0,0, Add into BOM=yes, Convert to PCB=yes, Datasheet=https://item.szlcsc.com/datasheet/0603B104K500NT/31683.html, Device=0603B104K500NT, FootprintName=C0603, Manufacturer Part=0603B104K500NT, ModelName=C0603_L1.6-W0.8-H0.8, Supplier=LCSC, Supplier Footprint=0603, Supplier Part=C30926, Symbol=0603B104K500NT
C2 C4: library part CL10C150JB8NNNC, "容值:15pF;精度:±5%;额定电压:50V;温度系数:C0G;", JLCPCB Part Class="Basic Part", LCSC Part Name="15pF ±5% 50V", Manufacturer=SAMSUNG(三星), Temperature Coefficient=C0G, Tolerance=±5%, Voltage Rating=50V, 3D Model=ac125912035d415993ca9572d50418b1, 3D Model Transform=62.992,31.496,0,0,0,0,0,0,0, Add into BOM=yes, Convert to PCB=yes, Datasheet=https://item.szlcsc.com/datasheet/CL10C150JB8NNNC/1996.html, Device=CL10C150JB8NNNC, FootprintName=C0603, Manufacturer Part=CL10C150JB8NNNC, ModelName=C0603_L1.6-W0.8-H0.8, Supplier=LCSC, Supplier Footprint=0603, Supplier Part=C1644, Symbol=CL10C150JB8NNNC
C7 C13: library part CL10B105KA8NNNC, "容值:1uF;精度:±10%;额定电压:25V;温度系数:X7R;", JLCPCB Part Class="Extended Part", LCSC Part Name="1uF ±10% 25V", Manufacturer=SAMSUNG(三星), Temperature Coefficient=X7R, Tolerance=±10%, Voltage Rating=25V, 3D Model=ac125912035d415993ca9572d50418b1, 3D Model Transform=62.992,31.496,0,0,0,0,0,0,0, Add into BOM=yes, Convert to PCB=yes, Datasheet=https://item.szlcsc.com/datasheet/CL10B105KA8NNNC/30690.html, Device=CL10B105KA8NNNC, FootprintName=C0603, Manufacturer Part=CL10B105KA8NNNC, ModelName=C0603_L1.6-W0.8-H0.8, Supplier=LCSC, Supplier Footprint=0603, Supplier Part=C29936, Symbol=CL10B105KA8NNNC
C10: library part CL21A106KAYNNNE_C15850, "容值:10uF;精度:±10%;额定电压:25V;温度系数:X5R;", JLCPCB Part Class="Basic Part", LCSC Part Name="10uF ±10% 25V", Manufacturer=SAMSUNG(三星), Manufacturer Part=CL21A106KAYNNNE, Temperature Coefficient=X5R, Tolerance=±10%, Voltage Rating=25V, 3D Model=1ba041120af144c991958decab20d241, 3D Model Transform=78.74,51.181,0,0,0,0,0,0.0005,0, Add into BOM=yes, Convert to PCB=yes, Datasheet=https://item.szlcsc.com/datasheet/CL21A106KAYNNNE/16532.html, Device=CL21A106KAYNNNE_C15850, FootprintName=C0805, ModelName=C0805_L2.0-W1.3-H1.3, Supplier=LCSC, Supplier Footprint=0805, Supplier Part=C15850, Symbol=CL21A106KAYNNNE
C11: library part CC1206KKX7R0BB225, "容值:2.2uF;精度:±10%;额定电压:100V;温度系数:X7R;", JLCPCB Part Class="Extended Part", LCSC Part Name="2.2uF ±10% 100V", Manufacturer=YAGEO(国巨), Temperature Coefficient=X7R, Tolerance=±10%, Voltage Rating=100V, 3D Model=e4be705b945545a48e666415e3682bd8, 3D Model Transform=125.984,62.992,0,0,0,0,0,0,0, Add into BOM=yes, Convert to PCB=yes, Datasheet=https://item.szlcsc.com/datasheet/CC1206KKX7R0BB225/604702.html, Device=CC1206KKX7R0BB225, FootprintName=C1206, Manufacturer Part=CC1206KKX7R0BB225, ModelName=C1206_L3.2-W1.6-H1.3, Supplier=LCSC, Supplier Footprint=1206, Supplier Part=C577211, Symbol=CC1206KKX7R0BB225
C12: library part CC0805KKX7R0BB224, "容值:220nF;精度:±10%;额定电压:100V;温度系数:X7R;", JLCPCB Part Class="Extended Part", LCSC Part Name="220nF ±10% 100V", Manufacturer=YAGEO(国巨), Temperature Coefficient=X7R, Tolerance=±10%, Voltage Rating=100V, 3D Model=1ba041120af144c991958decab20d241, 3D Model Transform=78.74,51.181,0,0,0,0,0,0.0005,0, Add into BOM=yes, Convert to PCB=yes, Datasheet=https://item.szlcsc.com/datasheet/CC0805KKX7R0BB224/528537.html, Device=CC0805KKX7R0BB224, FootprintName=C0805, Manufacturer Part=CC0805KKX7R0BB224, ModelName=C0805_L2.0-W1.3-H1.3, Supplier=LCSC, Supplier Footprint=0805, Supplier Part=C513710, Symbol=CC0805KKX7R0BB224
C14 C15 C16: library part CL31B226KPHNNNE, "容值:22uF;精度:±10%;额定电压:10V;温度系数:X7R;", JLCPCB Part Class="Extended Part", LCSC Part Name="22uF ±10% 10V", Manufacturer=SAMSUNG(三星), Temperature Coefficient=X7R, Tolerance=±10%, Voltage Rating=10V, 3D Model=e4be705b945545a48e666415e3682bd8, 3D Model Transform=125.984,62.992,0,0,0,0,0,0,0, Add into BOM=yes, Convert to PCB=yes, Datasheet=https://item.szlcsc.com/datasheet/CL31B226KPHNNNE/89174.html, Device=CL31B226KPHNNNE, FootprintName=C1206, Manufacturer Part=CL31B226KPHNNNE, ModelName=C1206_L3.2-W1.6-H1.3, Supplier=LCSC, Supplier Footprint=1206, Supplier Part=C87996, Symbol=CL31B226KPHNNNE
"CM35 IN" "CM35 OUT": "连接器类型:板端/插座-闭口;结构:1x8P;间距:3.81mm;颜色:绿色;安装方式:弯插;排数:1;每排PIN数:8;额定电流:8A;额定电压:300V;工作温度:-40℃~+105℃;", Color=绿色, Current Rating=8A, JLCPCB Part Class="Extended Part", LCSC Part Name="1x8P 3.81mm 排数:1 每排P数:8", Manufacturer=KEFA(科发), Operating Temperature=-40℃~+105℃, Voltage Rating (Max)=300V, AddInBom=yes, Connector Type=板端/插座-闭口, ConvertToPcb=yes, Datasheet=https://item.szlcsc.com/datasheet/KF2EDGR-3.81-8P/441161.html, Device=KF2EDGR-3.81-8P, FootprintName=CONN-TH_8P-P3.81_KF2EDGR-3.81-8P, ManufacturerPart=KF2EDGR-3.81-8P, ModelId=d9aa468e28fd44bdb19493be11d6b8ec聨0819f05c4eef4c71ace90d822a990e87, ModelName=CONN-TH_8P-P3.81_KF2EDGR-3.81-8P, ModelTransform=1231.4936,362.204,0,0,0,0,0,-129.882,-149.606, Mounting Type=弯插, Number of Pins=8P, Number of PINs Per Row=8, Number of Positions or Pins=1x8P, Number of Rows=1, Pitch=3.81mm, Supplier=LCSC, Supplier Footprint=弯插,P=3.81mm, SupplierPart=C441188, Symbol=KF2EDGR-3.81-8P
D1 D2 D3 D4 D5 D6 D7 D8: library part SMF30A_C720060, "极性:单向;反向截止电压(Vrwm):30V;钳位电压:48.4V;峰值脉冲电流(Ipp):4.1A;峰值脉冲功率(Ppp):200W;击穿电压(VBR):33.3V;", Clamping Voltage=48.4V, JLCPCB Part Class="Extended Part", LCSC Part Name="单向TVS 30V截止 峰值浪涌电流：4.1A", Manufacturer=Littelfuse(美国力特), Operating Temperature=-65℃~+150℃, Peak Pulse Current (Ipp)=4.1A, Peak Pulse Power Dissipation (Ppp)=200W, Reverse Leakage Current (Ir)=1uA, Reverse Stand-Off Voltage (Vrwm)=30V, Voltage - Breakdown=33.3V, AddInBom=yes, ConvertToPcb=yes, Datasheet=https://item.szlcsc.com/datasheet/SMF30A/763182.html, Device=SMF30A_C720060, FootprintName=SOD-123FL_L2.7-W1.8-LS3.7-R-RD, level of protection="IEC 61000-4-4；IEC 61000-4-2", ManufacturerPart=SMF30A, ModelId=51ab086dae9e4453b49fd2b9d25433ae聨0819f05c4eef4c71ace90d822a990e87, ModelName=SOD-123FL_L2.7-W1.8-LS3.7-R-RD, ModelTransform=143.701,70.866,0,0,0,0,0,0,0, Number of Channels=单路, Polarity=单向, Supplier=LCSC, Supplier Footprint=SOD-123FL, SupplierPart=C720060, Symbol=SMF30A_C720060, Type=TVS
D9: "正向压降(Vf):790mV@2A;直流反向耐压(Vr):100V;整流电流:2A;", Current - Rectified=2A, JLCPCB Part Class="Extended Part", LCSC Part Name="电压:100V 电流:2A", Manufacturer=ST(意法半导体), Non-Repetitive Peak Forward Surge Current=75A, Reverse Leakage Current (Ir)=1uA@100V, Voltage - DC Reverse(Vr)=100V, Voltage - Forward(Vf@If)=790mV@2A, AddInBom=yes, ConvertToPcb=yes, Datasheet=https://item.szlcsc.com/datasheet/STPS2H100A/82700.html, Device=STPS2H100A, FootprintName=SMA_L4.4-W2.6-LS5.0-RD, ManufacturerPart=STPS2H100A, ModelId=a2d22152f8d5421c8e96dbd56af7c345聨0819f05c4eef4c71ace90d822a990e87, ModelName=SMA_L4.4-W2.6-LS5.0-RD, ModelTransform=204.724,98.425,0,0,0,0,0,0,0, Supplier=LCSC, Supplier Footprint=SMA(DO-214AC), SupplierPart=C81548, Symbol=STPS2H100A
D10: "极性:单向;反向截止电压(Vrwm):30V;钳位电压:64.3V;峰值脉冲电流(Ipp):13A;峰值脉冲功率(Ppp):4kW@8/20us;击穿电压(VBR):35.1V;", Clamping Voltage=64.3V, JLCPCB Part Class="Extended Part", LCSC Part Name="单向TVS 30V截止 峰值浪涌电流：13A", Manufacturer=ST(意法半导体), Operating Temperature=-55℃~+150℃, Peak Pulse Current (Ipp)=13A, Peak Pulse Power Dissipation (Ppp)=4kW@8/20us, Reverse Leakage Current (Ir)=200nA, Reverse Stand-Off Voltage (Vrwm)=30V, Voltage - Breakdown=35.1V, AddInBom=yes, ConvertToPcb=yes, Datasheet=https://item.szlcsc.com/datasheet/SMBJ30A-TR/144970.html, Device=SMBJ30A-TR, FootprintName=SMB_L4.6-W3.6-LS5.3-RD, level of protection="IEC 61000-4-4；IEC 61000-4-2；IEC 61000-4-5", ManufacturerPart=SMBJ30A-TR, ModelId=5e8926c661484ff2a35b83e5ae62aeb9聨0819f05c4eef4c71ace90d822a990e87, ModelName=SMB_L4.6-W3.6-LS5.3-RD, ModelTransform=212.598,141.732,0,0,0,0,0,0,0, Polarity=单向, Supplier=LCSC, Supplier Footprint=SMB(DO-214AA), SupplierPart=C133663, Symbol=SMBJ30A-TR, Type=TVS
D11: library part USBLC6-2SC6_C7519, "极性:单向;反向截止电压(Vrwm):5.25V;钳位电压:17V;峰值脉冲电流(Ipp):5A;击穿电压:6V;", Clamping Voltage=17V, JLCPCB Part Class="Extended Part", Junction Capacitance=3.5pF, LCSC Part Name=单向ESD, Manufacturer=ST(意法半导体), Operating Temperature=-40℃~+125℃, Peak Pulse Current (Ipp)=5A, Reverse Leakage Current (Ir)=150nA, Reverse Stand-Off Voltage (Vrwm)=5.25V, Voltage - Breakdown=6V, AddInBom=yes, ConvertToPcb=yes, Datasheet=https://item.szlcsc.com/datasheet/USBLC6-2SC6/7996.html, Device=USBLC6-2SC6_C7519, FootprintName=SOT-23-6_L2.9-W1.6-P0.95-LS2.8-BL, level of protection="IEC 61000-4-2", ManufacturerPart=USBLC6-2SC6, ModelId=18da8f6c14a34920b3e136b5c401a119聨0819f05c4eef4c71ace90d822a990e87, ModelName=SOT-23-6_L2.9-W1.6-H1.5-LS2.8-P0.95, ModelTransform=110.236,113.364,0,90,0,0,0.0005,0.0005,0, Number of Channels=双路, Polarity=单向, Supplier=LCSC, Supplier Footprint=SOT-23-6L, SupplierPart=C7519, Symbol=USBLC6-2SC6, Type=ESD
D12: "二极管配置:1个独立式;稳压值(标称值):12V;稳压值(范围值):11.4V~12.6V;耗散功率(Pd):370mW;", JLCPCB Part Class="Extended Part", LCSC Part Name="独立式 耐压:12V 电流:1uA@9.1V", Manufacturer=DIODES(美台), Operating Junction Temperature Range=-65℃~+150℃, Pd - Power Dissipation=370mW, Reverse Leakage Current (Ir)=1uA@9.1V, Zener Voltage(Nom)=12V, Zener Voltage(Range)=11.4V~12.6V, AddInBom=yes, ConvertToPcb=yes, Datasheet=https://item.szlcsc.com/datasheet/MMSZ5242B-7-F/513114.html, Device=MMSZ5242B-7-F, Diode Configuration=1个独立式, FootprintName=SOD-123_L2.7-W1.6-LS3.7-RD-1, Impedance(Zzk)=600Ω, Impedance(Zzt)=30Ω, ManufacturerPart=MMSZ5242B-7-F, ModelId=528459655f7d4601a76356f3191c812b聨0819f05c4eef4c71ace90d822a990e87, ModelName=SOD-123_L2.7-W1.6-LS3.7-RD-1, ModelTransform=151.575,66.929,0,0,0,0,0,0,0, Supplier=LCSC, Supplier Footprint=SOD-123, SupplierPart=C500776, Symbol=MMSZ5242B-7-F
F1: "类型:贴片式保险丝;额定电流:500mA;额定电压:63V;分断能力:50A;", Current Rating=500mA, Interrupt Rating=50A, JLCPCB Part Class="Extended Part", LCSC Part Name=贴片式保险丝, Manufacturer=Littelfuse(美国力特), Operating Temperature=-55℃~+90℃, Voltage Rating (DC)=63V, AddInBom=yes, ConvertToPcb=yes, Datasheet=https://item.szlcsc.com/datasheet/0468.500NRHF/208112.html, Device=0468.500NRHF, Diameter (φD)=-, FootprintName=F1206, Height=0.635mm, Length=3.2mm, ManufacturerPart=0468.500NRHF, Melting I2t=0.031, ModelId=f1628daad26847a79b887277a2bc8541聨0819f05c4eef4c71ace90d822a990e87, ModelName=F1206_L3.2-W1.7-H0.6, ModelTransform=125.984,66.929,0,0,0,0,0,0,0, Pitch=-, Supplier=LCSC, Supplier Footprint=1206, SupplierPart=C206993, Symbol=0468.500NRHF, Type=贴片式保险丝, Width=1.6mm
L1: library part SWPA6045S220MT, "电感值:22uH;精度:±20%;额定电流:1.8A;饱和电流(Isat):2.2A;类型:-;", Current - Saturation(Isat)=2.2A, Current Rating=1.8A, DC Resistance(DCR)=89mΩ, JLCPCB Part Class="Extended Part", LCSC Part Name="22uH ±20% 2.2A", Manufacturer=Sunlord(顺络), Ratings=-, Tolerance=±20%, AddInBom=yes, ConvertToPcb=yes, Datasheet=https://item.szlcsc.com/datasheet/SWPA6045S220MT/84618.html, Device=SWPA6045S220MT, FootprintName=IND-SMD_L6.0-W6.0_SWPA6045S, ManufacturerPart=SWPA6045S220MT, ModelId=32cdbcb0fd69419d9d5b41a38560e127聨0819f05c4eef4c71ace90d822a990e87, ModelName=IND-SMD_L6.0-W6.0-H4.5, ModelTransform=236.22,237.007,0,90,0,0,-0.001,0.001,0, Supplier=LCSC, Supplier Footprint=SMD,6x6mm, SupplierPart=C83454, Symbol=SWPA6045S220MT, Type=-
Q1 Q2 Q3 Q4 Q5 Q6 Q7 Q8 Q9 Q10 Q11 Q12 Q13 Q14 Q15 Q16 Q17 Q18 Q19 Q20 Q21 Q22 Q23 Q24: library part 2N7002_C7420321, "数量:1个N沟道;漏源电压(Vdss):60V;连续漏极电流(Id):115mA;导通电阻(RDS(on)):900mΩ@10V;耗散功率(Pd):225mW;阈值电压(Vgs(th)):1.6V@250uA;", Current - Continuous Drain(Id)=115mA, Drain to Source Voltage=60V, Gate Threshold Voltage (Vgs(th))=1.6V@250uA, Input Capacitance(Ciss)=50pF, JLCPCB Part Class="Extended Part", LCSC Part Name=N沟道,电流:115mA,耐压:60V, Manufacturer=R+O(宏嘉诚), Operating Temperature=-55℃~+150℃, Output Capacitance(Coss)=25pF, Pd - Power Dissipation=225mW, Reverse Transfer Capacitance (Crss@Vds)=5pF, 3D Model=c62791f0466c4ae2a892c056b845b0ca聨0819f05c4eef4c71ace90d822a990e87, 3D Model Transform=98.425,114.173,0,180,0,0,0.0005,-0.0005,0, AddInBom=yes, ConvertToPcb=yes, Datasheet=https://item.szlcsc.com/datasheet/2N7002/8397143.html, Device=2N7002_C7420321, FootprintName=SOT-23-3_L2.9-W1.3-P1.90-LS2.4-BR, Gate Charge(Qg)=1.6nC@10V, Manufacturer Part=2N7002, ModelName=SOT-23-3P_L2.9-W1.3-H1.0-LS2.4-P0.95, Number=1个N沟道, RDS(on)=900mΩ@10V, Supplier=LCSC, Supplier Footprint=SOT-23, Supplier Part=C7420321, Symbol=2N7002_C7420321, Type=N沟道
Q25: "数量:1个N沟道;漏源电压(Vdss):100V;连续漏极电流(Id):42A；10A;导通电阻(RDS(on)):13.5mΩ@10V;耗散功率(Pd):2W；35W;阈值电压(Vgs(th)):3.5V;", Current - Continuous Drain(Id)=42A；10A, Drain to Source Voltage=100V, Gate Threshold Voltage (Vgs(th))=3.5V, Input Capacitance(Ciss)=1.871nF, JLCPCB Part Class="Extended Part", LCSC Part Name="1个N沟道 耐压:100V 电流:42A 电流:10A", Manufacturer=DIODES(美台), Operating Temperature=-55℃~+150℃, Pd - Power Dissipation=2W；35W, Reverse Transfer Capacitance (Crss@Vds)=6.9pF, AddInBom=yes, ConvertToPcb=yes, Datasheet=https://item.szlcsc.com/datasheet/DMT10H015LFG-13/6960463.html, Device=DMT10H015LFG-13, FootprintName=POWERDI3333-8_L3.3-W3.3-P0.65-LS3.7-BL-EP, Gate Charge(Qg)=33.3nC@10V, ManufacturerPart=DMT10H015LFG-13, ModelId=ffb4bc7fd9f5455f82908568c15d55f5聨0819f05c4eef4c71ace90d822a990e87, ModelName=POWERDI3333-8_L3.3-W3.3-P0.65-LS3.7-BL-EP, ModelTransform=130.708,130.708,0,0,0,0,0,0.002,0, Number=1个N沟道, RDS(on)=13.5mΩ@10V, Supplier=LCSC, Supplier Footprint=PowerDI3333-8, SupplierPart=C6021899, Symbol=DMT10H015LFG-13
R1 R7 R8 R9 R10 R11 R12 R13 R14 R20 R21 R22 R23 R24 R25 R26 R27 R28 R29 R30 R31 R32 R33 R34 R35 R36 R38 R39 R40 R41 R43 R44 R45 R46 R47 R48 R49 R50 R51 R52 R54 R55 R56 R58 R59 R60 R61 R62 R63 R64 R65: library part RC0603FR-0710KL, "电阻类型:厚膜电阻;阻值:10kΩ;精度:±1%;功率:100mW;工作电压:75V;温度系数:±100ppm/℃;", JLCPCB Part Class="Extended Part", LCSC Part Name="厚膜电阻 10kΩ ±1% 100mW", Manufacturer=YAGEO(国巨), Operating Temperature=-55℃~+155℃, Power(Watts)=100mW, Temperature Coefficient=±100ppm/℃, Tolerance=±1%, Voltage-Supply(Max)=75V, 3D Model=fc143cca1e79419f9cd78b61e9279f08, 3D Model Transform=31.8897,63.7794,0,90,0,0,0,0,0, Add into BOM=yes, Convert to PCB=yes, Datasheet=https://item.szlcsc.com/datasheet/RC0603FR-0710KL/99429.html, Device=RC0603FR-0710KL, FootprintName=R0603, Manufacturer Part=RC0603FR-0710KL, ModelName=R0603, Supplier=LCSC, Supplier Footprint=0603, Supplier Part=C98220, Symbol=RC0603FR-0710KL, Type=厚膜电阻
R2 R3 R4 R5 R15 R16 R17 R18: library part FRC0603F1000TS, "电阻类型:厚膜电阻;阻值:100Ω;精度:±1%;功率:100mW;工作电压:75V;温度系数:±100ppm/℃;", JLCPCB Part Class="Extended Part", LCSC Part Name="100Ω ±1% 100mW 厚膜电阻", Manufacturer=FOJAN(富捷), Operating Temperature=-55℃~+155℃, Power(Watts)=100mW, Temperature Coefficient=±100ppm/℃, Tolerance=±1%, Voltage-Supply(Max)=75V, 3D Model=fc143cca1e79419f9cd78b61e9279f08, 3D Model Transform=31.8897,63.7794,0,90,0,0,0,0,0, Add into BOM=yes, Convert to PCB=yes, Datasheet=https://item.szlcsc.com/datasheet/FRC0603F1000TS/3180494.html, Device=FRC0603F1000TS, FootprintName=R0603, Manufacturer Part=FRC0603F1000TS, ModelName=R0603, Supplier=LCSC, Supplier Footprint=0603, Supplier Part=C2906981, Symbol=FRC0603F1000TS, Type=厚膜电阻
R6 R19: library part FRC0603F0000TS, "电阻类型:厚膜电阻;阻值:0Ω;精度:±1%;功率:100mW;工作电压:75V;", JLCPCB Part Class="Extended Part", LCSC Part Name="0Ω ±1% 100mW 厚膜电阻", Manufacturer=FOJAN(富捷), Operating Temperature=-55℃~+155℃, Power(Watts)=100mW, Tolerance=±1%, Voltage-Supply(Max)=75V, 3D Model=fc143cca1e79419f9cd78b61e9279f08, 3D Model Transform=31.8897,63.7794,0,90,0,0,0,0,0, Add into BOM=yes, Convert to PCB=yes, Device=FRC0603F0000TS, FootprintName=R0603, Manufacturer Part=FRC0603F0000TS, ModelName=R0603, Supplier=LCSC, Supplier Footprint=0603, Supplier Part=C2906974, Symbol=FRC0603F0000TS, Type=厚膜电阻
R37 R66: library part 0603WAF1003T5E, "电阻类型:厚膜电阻;阻值:100kΩ;精度:±1%;功率:100mW;工作电压:75V;温度系数:±100ppm/℃;", JLCPCB Part Class="Basic Part", LCSC Part Name="厚膜电阻 100kΩ ±1%", Manufacturer=UNI-ROYAL(厚声), Operating Temperature=-55℃~+155℃, Power(Watts)=100mW, Temperature Coefficient=±100ppm/℃, Tolerance=±1%, Voltage-Supply(Max)=75V, 3D Model=fc143cca1e79419f9cd78b61e9279f08, 3D Model Transform=31.8897,63.7794,0,90,0,0,0,0,0, Add into BOM=yes, Convert to PCB=yes, Datasheet=https://item.szlcsc.com/datasheet/0603WAF1003T5E/26546.html, Device=0603WAF1003T5E, FootprintName=R0603, Manufacturer Part=0603WAF1003T5E, ModelName=R0603, Supplier=LCSC, Supplier Footprint=0603, Supplier Part=C25803, Symbol=0603WAF1003T5E, Type=厚膜电阻
R42: library part FRC0603F4322TS, "电阻类型:厚膜电阻;阻值:43.2kΩ;精度:±1%;功率:100mW;工作电压:75V;温度系数:±100ppm/℃;", JLCPCB Part Class="Extended Part", LCSC Part Name="43.2kΩ ±1% 100mW 厚膜电阻", Manufacturer=FOJAN(富捷), Operating Temperature=-55℃~+155℃, Power(Watts)=100mW, Temperature Coefficient=±100ppm/℃, Tolerance=±1%, Voltage-Supply(Max)=75V, 3D Model=fc143cca1e79419f9cd78b61e9279f08, 3D Model Transform=31.8897,63.7794,0,90,0,0,0,0,0, Add into BOM=yes, Convert to PCB=yes, Device=FRC0603F4322TS, FootprintName=R0603, Manufacturer Part=FRC0603F4322TS, ModelName=R0603, Supplier=LCSC, Supplier Footprint=0603, Supplier Part=C2930102, Symbol=FRC0603F4322TS, Type=厚膜电阻
R53 R57: library part FRC0603F5101TS, "电阻类型:厚膜电阻;阻值:5.1kΩ;精度:±1%;功率:100mW;工作电压:75V;温度系数:±100ppm/℃;", JLCPCB Part Class="Extended Part", LCSC Part Name="5.1kΩ ±1% 100mW 厚膜电阻", Manufacturer=FOJAN(富捷), Operating Temperature=-55℃~+155℃, Power(Watts)=100mW, Temperature Coefficient=±100ppm/℃, Tolerance=±1%, Voltage-Supply(Max)=75V, 3D Model=fc143cca1e79419f9cd78b61e9279f08, 3D Model Transform=31.8897,63.7794,0,90,0,0,0,0,0, Add into BOM=yes, Convert to PCB=yes, Device=FRC0603F5101TS, FootprintName=R0603, Manufacturer Part=FRC0603F5101TS, ModelName=R0603, Supplier=LCSC, Supplier Footprint=0603, Supplier Part=C2907044, Symbol=FRC0603F5101TS, Type=厚膜电阻
"RESET SW": "电路结构:单刀单掷;按钮形状:圆形按钮;作用力:1.6N;安装方式:立贴;开关长度:3.9mm;开关宽度:3mm;开关高度:2mm;带支架:不带支架;触点电流:50mA;额定电压:12V;带灯:-;工作寿命:10万次;", Actuator/Cap Color=黑色, Contact Current=50mA, IP Rating=-, JLCPCB Part Class="Basic Part", LCSC Part Name="3.9*3*2mm 立贴 轻触开关", Manufacturer=XUNPU(讯普), Operating Force=1.6N, Operating Temperature=-30℃~+80℃, Voltage Rating=12V, 3D Model=b26698b69f274ffabef8a26c7d0e5dd1, 3D Model Transform=188.976,114.174,0,0,0,0,0,0,0, Actuator Style=圆形按钮, Add into BOM=yes, Circuit=单刀单掷, Convert to PCB=yes, Datasheet=https://item.szlcsc.com/datasheet/TS-1088-AR02016/763484.html, Device=TS-1088-AR02016, FootprintName=SW-SMD_L3.9-W3.0-P4.45, Length=3.9mm, Life=10万次, Manufacturer Part=TS-1088-AR02016, ModelName=SW-SMD_L3.9-W2.9-H2.0-LS4.8, Mounting Type=立贴, Supplier=LCSC, Supplier Footprint=SMD,4x3mm, Supplier Part=C720477, Switch Height=2mm, Symbol=TS-1088-AR02016, Termination Style=SMD接片, Width=3mm, with Bracket=不带支架, With Lamp=-
SENSOR1 SENSOR2 SENSOR3 SENSOR4: "连接器类型:板端/插座-闭口;结构:1x4P;间距:3.81mm;颜色:绿色;安装方式:弯插;排数:1;每排PIN数:4;额定电流:8A;额定电压:300V;工作温度:-40℃~+105℃;", Color=绿色, Current Rating=8A, JLCPCB Part Class="Extended Part", LCSC Part Name="1x4P 3.81mm 排数:1 每排P数:4", Manufacturer=KEFA(科发), Operating Temperature=-40℃~+105℃, Voltage Rating (Max)=300V, AddInBom=yes, Connector Type=板端/插座-闭口, ConvertToPcb=yes, Datasheet=https://item.szlcsc.com/datasheet/KF2EDGR-3.81-4P/441157.html, Device=KF2EDGR-3.81-4P, FootprintName=CONN-TH_4P-P3.81_KF2EDGR-3.81-4P, ManufacturerPart=KF2EDGR-3.81-4P, ModelId=92f33792c81f433e85da8d70412a8b64聨0819f05c4eef4c71ace90d822a990e87, ModelName=CONN-TH_KF3.81-WI-4P, ModelTransform=634.644,360.2355,0,0,0,0,0,-118.11,-137.795, Mounting Type=弯插, Number of Pins=4P, Number of PINs Per Row=4, Number of Positions or Pins=1x4P, Number of Rows=1, Pitch=3.81mm, Supplier=LCSC, Supplier Footprint=弯插,P=3.81mm, SupplierPart=C441184, Symbol=KF2EDGR-3.81-4P
SWD: "插针结构:1x5P;间距:2mm;圆针/方针:方针;排数:单排;总PIN位数:5P;额定电流:2A;额定电压:250V;塑高:2mm;端接针长度:2.8mm;触头材质:黄铜;触头镀层:金;工作温度:-25℃~+80℃;颜色:黑色;", Color=黑色, Current Rating=2A, JLCPCB Part Class="Extended Part", LCSC Part Name="1x5P 间距:2mm 方针", Manufacturer=LAILAN(莱联), Operating Temperature=-25℃~+80℃, Voltage Rating (Max)=250V, AddInBom=yes, Circluar Pins/Square Pins=方针, Contact Material=黄铜, Contact Plating=金, ConvertToPcb=yes, Datasheet=https://item.szlcsc.com/datasheet/LAIL-PZ2.0-5P-L/58519935.html, Device=LAIL-PZ2.0-5P-L, FootprintName=HDR-TH_LAIL-PZ2.0-5P-L, Insulation Height=2mm, Length of End Connection Pin=2.8mm, ManufacturerPart=LAIL-PZ2.0-5P-L, Number of Pins=5P, Number of Rows=单排, Pin Structure=1x5P, Pitch=2mm, Supplier=LCSC, Supplier Footprint=插件,P=2mm, SupplierPart=C54950582, Symbol=LAIL-PZ2.0-5P-L
U1: "CPU内核:ARM Cortex-M3;CPU最大主频:72MHz;CPU位数:32 Bit;", JLCPCB Part Class="Extended Part", LCSC Part Name="主流增强型ARM Cortex-M3 MCU，具有64 KB Flash、72 MHz CPU、电机控制、USB和CAN", Manufacturer=ST(意法半导体), Operating Temperature=-40℃~+85℃, Voltage - Supply=2V~3.6V, ADC (Bit)=12bit, AddInBom=yes, ConvertToPcb=yes, Core Size="32 Bit", CPU Core="ARM Cortex-M3", CPU Maximum Speed=72MHz, Datasheet=https://item.szlcsc.com/datasheet/STM32F103C8T6/9243.html, Device=STM32F103C8T6, EEPROM=-, FootprintName=LQFP-48_L7.0-W7.0-P0.50-LS9.0-BL, ManufacturerPart=STM32F103C8T6, ModelId=093be70396ff421eb2cdb946d5311efc聨0819f05c4eef4c71ace90d822a990e87, ModelName=LQFP-48_L7.0-W7.0-H1.4-LS9.0-P0.50, ModelTransform=354.331,354.331,0,0,0,0,0,0,0, Number of I/O=37, Oscillator Type=内置, Program Memory Type=FLASH, Program Storage Size=64KB, RAM Size=20KB, Supplier=LCSC, Supplier Footprint=LQFP-48(7x7), SupplierPart=C8734, Symbol=STM32F103C8T6
U2: "功能类型:降压型;工作电压:4.2V~65V;输出电压:1V~28V;输出电流:1A;输出类型:可调;", Frequency - Switching=400kHz, JLCPCB Part Class="Extended Part", LCSC Part Name="降压型 1A 4.2V~65V", Manufacturer=TI(德州仪器), Operating Temperature=-40℃~+125℃@(TJ), Output Current=1A, Output Voltage=1V~28V, Quiescent Current=26uA, Voltage - Supply=4.2V~65V, AddInBom=yes, ConvertToPcb=yes, Datasheet=https://www.ti.com/cn/lit/ds/symlink/lmr36510.pdf, Device=LMR36510FADDAR, Features=轻载高效模式；内置LDO稳压器；逐波限流；工作状态指示；打嗝限流, FootprintName=ESOP-8_L4.9-W3.9-P1.27-LS6.0-BL-EP-1, Function=降压型, ManufacturerPart=LMR36510FADDAR, ModelId=1edf17d9e1eb44b9aabe355eb95382d1聨0819f05c4eef4c71ace90d822a990e87, ModelName=ESOP-8_L4.9-W3.9-P1.27-LS6.0-BL-EP-1, ModelTransform=192.913,236.22,0,0,0,0,0,0,0, Number of Outputs=1, Output Type=可调, Supplier=LCSC, Supplier Footprint=ESOP-8, SupplierPart=C1858394, Switch tube (built-in/external)=内置, Symbol=LMR36510FADDAR, Synchronous Rectifier=是, Topology=降压式
U3: "应用功能:收发器;USB协议版本:USB 2.0;通道数:-;数据速率:2Mbps;", Current - Supply=7mA, JLCPCB Part Class="Extended Part", LCSC Part Name=USB转串口芯片, Manufacturer=WCH(南京沁恒), Operating Temperature=-20℃~+70℃, Quiescent Supply Current=50uA, Voltage - Supply=3.3V；5V, AddInBom=yes, Applications Function=收发器, ConvertToPcb=yes, Data Rate=2Mbps, Datasheet=https://item.szlcsc.com/datasheet/CH340C/85852.html, Device=CH340C, Features=可编程波特率；内置时钟发生器；上电复位, FootprintName=SOP-16_L10.0-W3.9-P1.27-LS6.0-BL, ManufacturerPart=CH340C, ModelId=3361a6792abf4a8f8fbca4f1924a67ee聨0819f05c4eef4c71ace90d822a990e87, ModelName=SOP-16_L9.9-W3.9-H1.5-LS6.0-P1.27, ModelTransform=240.39054,393.7,0,90,0,0,0,0,0, Number of Channels=-, Supplier=LCSC, Supplier Footprint=SOP-16, SupplierPart=C84681, Symbol=CH340C, USB Protocol="USB 2.0"
U4: "ISO7721 EMC 性能优异的双通道、1/1、增强型数字隔离器", Isolation Voltage(Vrms)=5000, JLCPCB Part Class="Extended Part", LCSC Part Name="EMC性能优异的高速 增强型和基础型双通道数字隔离器", Manufacturer=TI(德州仪器), Operating Temperature=-55℃~+125℃, Voltage - Supply(VCCA)=2.25V~5.5V, AddInBom=yes, CMTI(kV/us)=100kV/us, ConvertToPcb=yes, Data Rate(Max)=100Mbps, Datasheet=https://www.ti.com/cn/lit/gpn/iso7721, Default Output=高电平, Device=ISO7721DR, Features=失效安全输出, FootprintName=SOIC-8_L5.0-W4.0-P1.27-LS6.0-BL, ManufacturerPart=ISO7721DR, ModelId=7abc64c95a1a4a04a4ef38f9097c870b聨0819f05c4eef4c71ace90d822a990e87, ModelName=SOIC-8_L5.0-W4.0-P1.27-LS6.0-BL, ModelTransform=192.913,236.22,0,0,0,0,0,0,0, Number of Forward Channels=1, Number of Reverse Channels=1, Propagation Delay(tpd)=11ns, Supplier=LCSC, Supplier Footprint=SOIC-8, SupplierPart=C366164, Symbol=ISO7721DR, Voltage - Supply(VCCB)=2.25V~5.5V
USB-UART: "连接器类型:Type-C;协议标准:-;公母:母;安装方式:卧贴;触点数量:16P;端口数量:1;额定电流 - 电源:5A;工作温度:-30℃~+80℃;", Current Rating-Power=5A, JLCPCB Part Class="Extended Part", LCSC Part Name="Type-C 母 卧贴", Manufacturer=韩国韩荣, Operating Temperature=-30℃~+80℃, Voltage Rating=20V, AddInBom=yes, Connect-Disconnect Life=1万次, Connector Type=Type-C, ConvertToPcb=yes, Datasheet=https://item.szlcsc.com/datasheet/TYPE-C-31-M-12/177331.html, Device=TYPE-C-31-M-12, FootprintName=USB-C_SMD-TYPE-C-31-M-12_1, Gender=母, Length=7.35mm, ManufacturerPart=TYPE-C-31-M-12, ModelId=2a22bb5af8894b85972aeeacf9cd92d0聨0819f05c4eef4c71ace90d822a990e87, ModelName=USB-C_SMD-TYPE-C-31-M-12_1, ModelTransform=351.9678,311.023,0,180,0,0,0,-43.307,-33.465, Mounting Type=卧贴, Number of Contacts=16P, Number of Ports=1, Protocol Standard=-, Supplier=LCSC, Supplier Footprint=SMD, SupplierPart=C165948, Symbol=TYPE-C-31-M-12
X1: library part SX32Y008000BC1T001, "晶振类型:贴片晶振;频率:8MHz;常温频差:±10ppm;负载电容:12pF;频率稳定度:±30ppm;", Equivalent Series Resistance(ESR)=300Ω, Frequency Stability=±30ppm, JLCPCB Part Class="Extended Part", LCSC Part Name="8MHz ±10ppm 12pF", Load Capacitance=12pF, Manufacturer=TKD(泰晶), Normal temperature Frequency Tolerance=±10ppm, Operating Temperature=-40℃~+85℃, AddInBom=yes, ConvertToPcb=yes, Datasheet=https://item.szlcsc.com/datasheet/SX32Y008000BC1T001/21988737.html, Device=SX32Y008000BC1T001, FootprintName=CRYSTAL-SMD_4P-L3.2-W2.5-BL, ManufacturerPart=SX32Y008000BC1T001, ModelId=ff2dfd5650294453a14147960efe1838聨0819f05c4eef4c71ace90d822a990e87, ModelName=CRYSTAL-SMD_4P-L3.2-W2.5-BL, ModelTransform=125.984,98.425,0,0,0,0,0,0,0, Supplier=LCSC, Supplier Footprint=SMD3225-4P, SupplierPart=C20617233, Symbol=SX32Y008000BC1T001, Type=贴片晶振

## Free pads (board coordinates)
  round 125.98 hole 125.98 unplated: 2(157.48,157.48) 2(157.48,2992.13) 2(3773.23,157.48) 2(3773.23,2992.13)
  round 78.74 smd paste-99999: 3(520,2995) 4(695,3000)

## Via types
v1: diameter 23.62, hole 11.81, Top Layer to Bottom Layer, 228 vias
v2: diameter 19.68, hole 11.81, Top Layer to Bottom Layer, 90 vias

## Nets (pads, with @x,y where several pads share a name; then routed paths per layer and width w, separated by ;. In a path a pad name is that pad's centre, name@x,y a point inside that pad or via, vN(x,y) a via of type N, cw(c..) or ccw(c..) an arc to the next point about the centre after c; other vN are vias at no path point)
3V3: BOOT0.2 C1.2 C3.2 C5.2 C8.2 C10.1 C14.2 C15.2 C16.2 C22.2 L1.2 pad.4 Q1.1 Q2.1 Q3.1 Q4.1 Q5.1 Q6.1 Q7.1 Q8.1 Q9.1 Q10.1 Q11.1 Q12.1 Q13.1 Q14.1 Q15.1 Q16.1 Q17.1 Q18.1 Q19.1 Q20.1 Q21.1 Q22.1 Q23.1 Q24.1 R8.1 R10.1 R12.1 R14.1 R19.1 R21.1 R23.1 R25.1 R27.1 R30.2 R31.2 R33.2 R36.2 R37.2 R39.2 R40.2 R44.2 R45.2 R48.2 R49.2 R52.2 R54.2 R58.2 R59.2 R62.2 R63.2 SWD.1 U1.1 U1.24 U1.36 U1.48 U4.8 | length 17635.8
  Top Layer w10: C10.1@1590,1585 1630,1585 1650,1565 1735.95,1565 1741.81,1570.86 1741.81,1584.25 C1.2@1752.56,1595 ; C3.2@1720,1650 1778.78,1650 U1.48@1778.9,1649.89 ; C1.2@1757.56,1588.03 1780.59,1565 1831.77,1565 1833.27,1566.5 1837.66,1566.5 1837.95,1566.79 U1.1@1837.95,1590.84 ; C5.2@1795.12,1931.97 1813.15,1950 1837.46,1950 1837.95,1949.52 U1.36@1837.95,1925.47 ; U1.24@2113.54,1866.42 C8.2@2171.42,1866.42
  Top Layer w12: pad.4@695,3000 pad.4@705,2990 ; v2(1685,1940) 1710,1965 1780,1965 1787.03,1957.97 1787.03,1940.06 C5.2@1795.12,1931.97 ; C3.2@1715,1660 1715,1650 1716.25,1648.75 1716.25,1631.31 1740.84,1606.72 1742.81,1606.72 1752.56,1596.97 C1.2@1752.56,1595